# EAGLE board Float_V3_PCB_v5 (EAGLE 9.7.0)
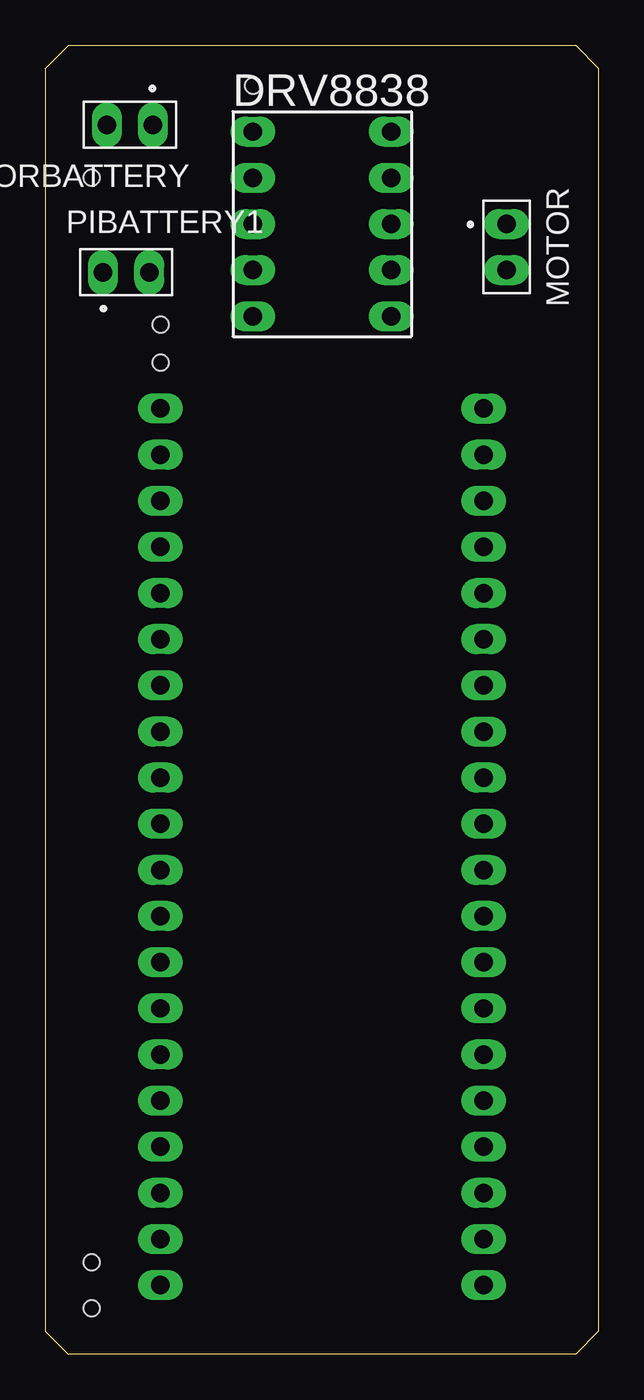
[diagram p0: board, top side]
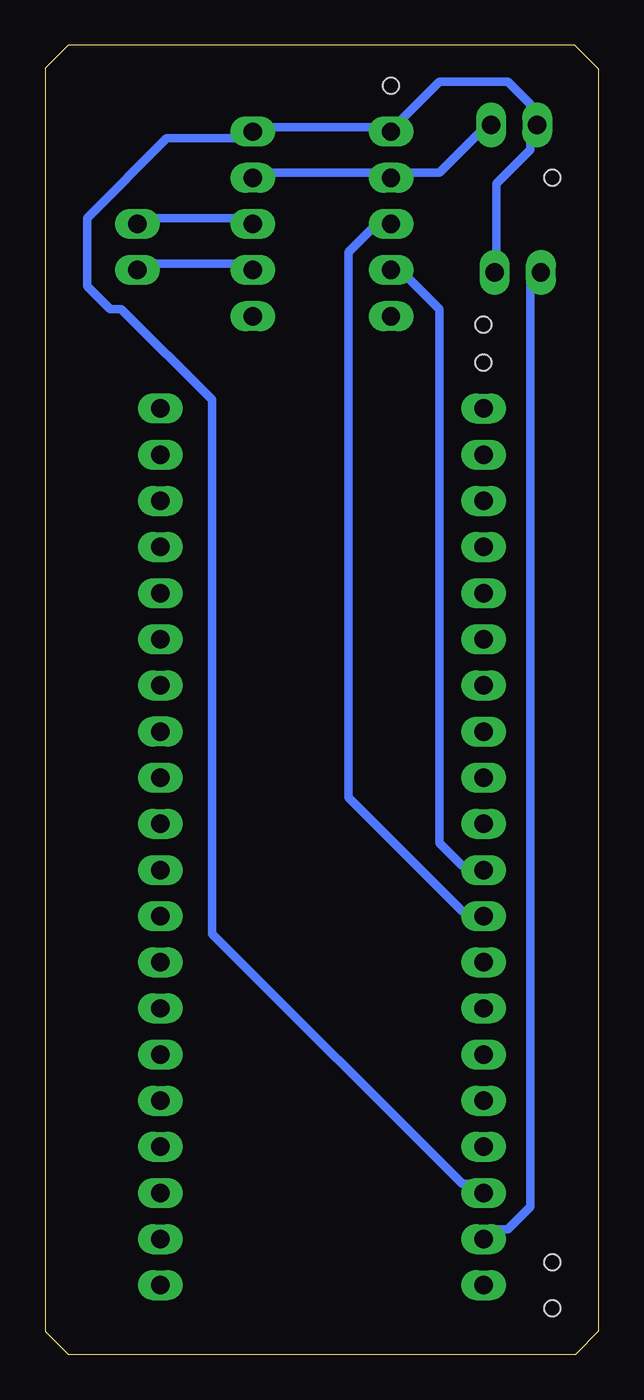
[diagram p1: board, bottom side, seen from below]

Size 30.46 x 72.04 mm. Coordinates in mm from the lower left corner, seen from the top.
Outline: 0,70.75 0,1.25 1.25,0 29.21,0 30.46,1.25 30.46,70.79 29.21,72.04 1.29,72.04 0,70.75
Copper layers (1*16): Top / Bottom
Stack-up Default Layer Stack: Top User Defined 0.035mm / Dielectric-1 User Defined 1.5mm / Bottom User Defined 0.035mm
Design rules "OthermillDRC_1_32_v2": minimum track width 8mil, minimum drill 0.8mm, track to track 0.794003125mm, track to pad 0.794003125mm, pad to pad 0.794003125mm, via to via 0.794003125mm, smd to smd 0mil, copper to edge 0mil, drill to drill 1mil, minimum pad ring 10mil, minimum via ring 10mil, stop-mask expansion 1mil, vias tented up to drill 30mil, thermal gap 10mil
Net classes: 0 default: width 0.457 mm, drill 1.016 mm, clearance 0.457 mm
Holes 0.89 mm at 6.35,56.66 6.35,54.59 2.54,64.75 11.43,69.83 2.54,5.06 2.54,2.52

## Footprints (pad centres in the part's own frame; a part is rotated, then mirrored left to right if it is on the bottom)
61300211121 = drill 1.016 pad 1.651 long: 1 -1.27,0; 2 1.27,0
PIPICO = drill 1.016 pad 1.651 long: 1 0,48.26; 2 0,45.72; 3 0,43.18; 4 0,40.64; 5 0,38.1; 6 0,35.56; 7 0,33.02; 8 0,30.48; 9 0,27.94; 10 0,25.4; 11 0,22.86; 12 0,20.32; 13 0,17.78; 14 0,15.24; 15 0,12.7; 16 0,10.16; 17 0,7.62; 18 0,5.08; 19 0,2.54; 20 0,0; 21 17.8,0; 22 17.8,2.54; 23 17.8,5.08; 24 17.8,7.62; 25 17.8,10.16; 26 17.8,12.7; 27 17.8,15.24; 28 17.8,17.78; 29 17.8,20.32; 30 17.8,22.86; 31 17.8,25.4; 32 17.8,27.94; 33 17.8,30.48; 34 17.8,33.02; 35 17.8,35.56; 36 17.8,38.1; 37 17.8,40.64; 38 17.8,43.18; 39 17.8,45.72; 40 17.8,48.26
DRV8838 = drill 1.016 pad 1.651 long: _SLEEP_ 8.89,-6.35; ENABLE 8.89,-1.27; GND 8.89,3.81; GND1 16.51,3.81; OUT1 16.51,-3.81; OUT2 16.51,-1.27; PHASE 8.89,-3.81; VCC 8.89,1.27; VIN 16.51,1.27; VM 16.51,-6.35

## Placement (x,y rotation side)
MOTOR  61300211121  [61300211121]  25.4,60.94 270 top
MOTORBATTERY  61300211121  [61300211121]  4.65,67.67 180 top
PIBATTERY1  61300211121  [61300211121]  4.45,59.55 0 top
U$1  PIPICO  [PIPICO]  24.13,52.05 180 top
U$2  DRV8838  [DRV8838]  2.54,63.48 0 top

## Library data of the parts
MOTOR MOTORBATTERY PIBATTERY1 = Aaron Electronics Library; CREATED_BY: PCBLayout.com; DIGI_KEY_PART_NUMBER: 732-5315-ND; MANUFACTURER: Wurth Electronics Inc.; MPN: 61300211121
U$1 U$2 = Aaron Electronics Library

## Nets
N$1: MOTORBATTERY.1 U$2.VCC U$2.VIN
N$2: PIBATTERY1.1 U$1.39
N$3: U$1.32 U$2.ENABLE
N$4: U$1.31 U$2.PHASE
N$5: MOTOR.1 U$2.OUT2
N$6: MOTOR.2 U$2.OUT1
N$7: MOTORBATTERY.2 PIBATTERY1.2 U$1.38 U$2.GND U$2.GND1

## Tracks (layer width: path | path; a pad name or v marks a point on that pad's centre or on a via)
N$1
  Bottom 0.457: MOTORBATTERY.1 6.26,67.55 8.76,65.04 11.26,65.04 U$2.VCC 11.89,65.04 18.77,65.04 U$2.VIN
N$2
  Bottom 0.457: PIBATTERY1.1 3.75,59.41 3.75,8.11 5,6.86 6.26,6.86 U$1.39
N$3
  Bottom 0.457: U$1.32 6.88,24.38 7.51,24.38 13.76,30.63 13.76,60.66 11.89,62.54 U$2.ENABLE
N$4
  Bottom 0.457: U$1.31 6.88,26.88 7.51,26.88 8.76,28.13 8.76,57.53 11.26,60.04 U$2.PHASE
N$5
  Bottom 0.457: U$2.OUT2 19.39,62.54 25.02,62.54 MOTOR.1
N$6
  Bottom 0.457: U$2.OUT1 19.39,60.04 25.02,60.04 MOTOR.2
N$7
  Bottom 0.457: PIBATTERY1.2 5.63,60.04 5.63,64.42 3.75,66.29 3.75,67.55 MOTORBATTERY.2 3.75,68.17 3.75,68.8 5,70.05 8.76,70.05 11.26,67.55 U$2.GND 11.89,67.55 18.77,67.55 U$2.GND1 19.39,66.92 23.77,66.92 28.15,62.54 28.15,58.79 26.9,57.53 26.27,57.53 21.27,52.53 21.27,23.13 7.51,9.36 6.88,9.36 U$1.38